# EAGLE board Tracker_V1 (EAGLE 9.6.2)
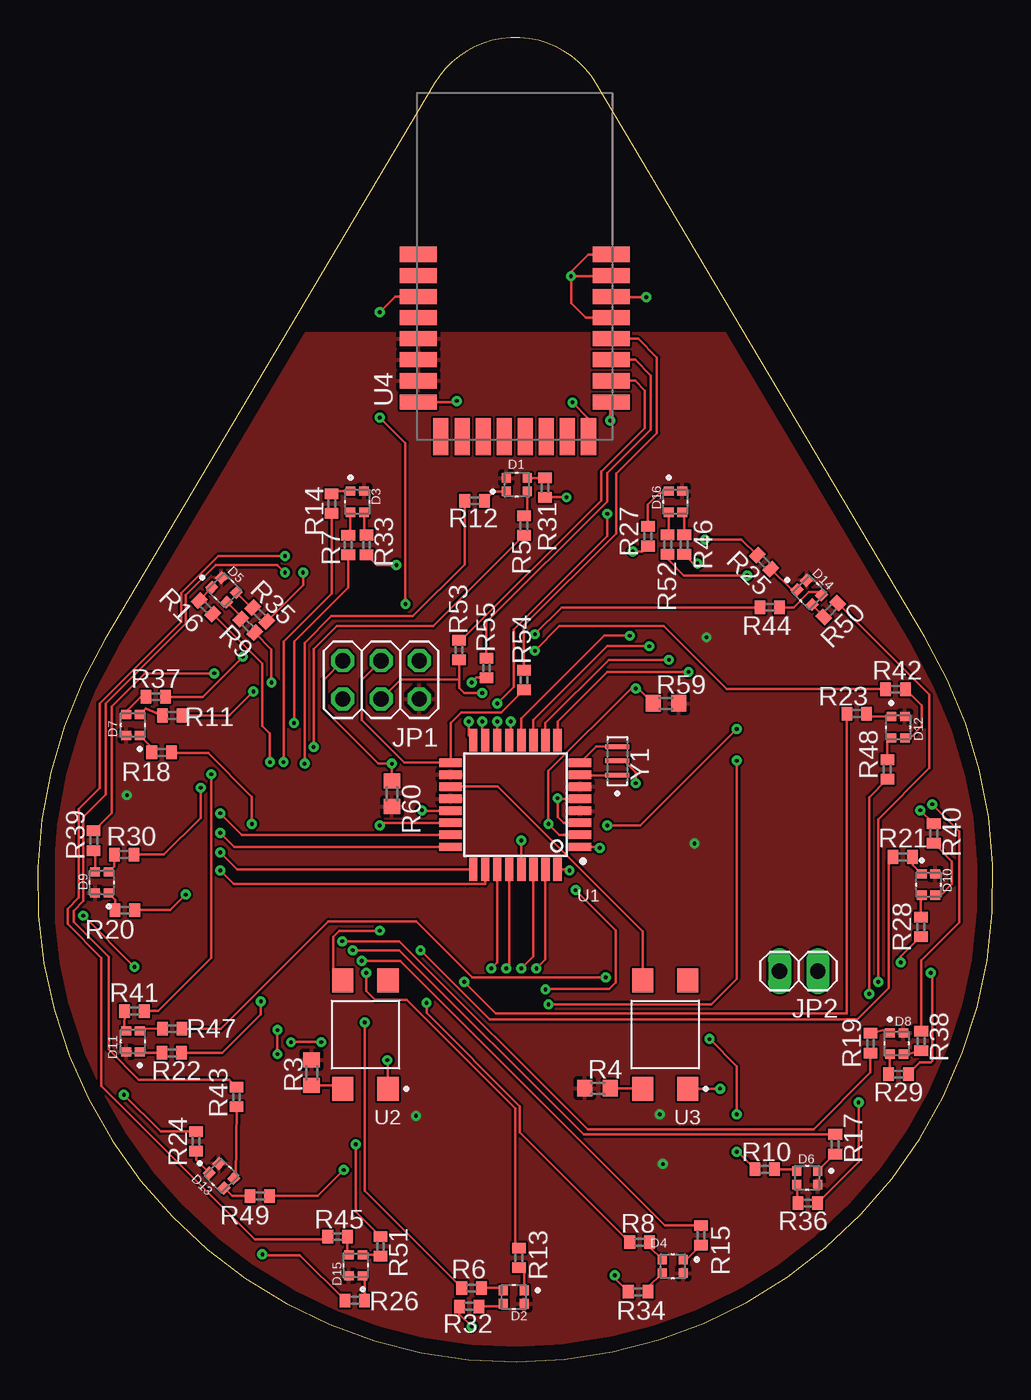
[diagram p0: board, top side]
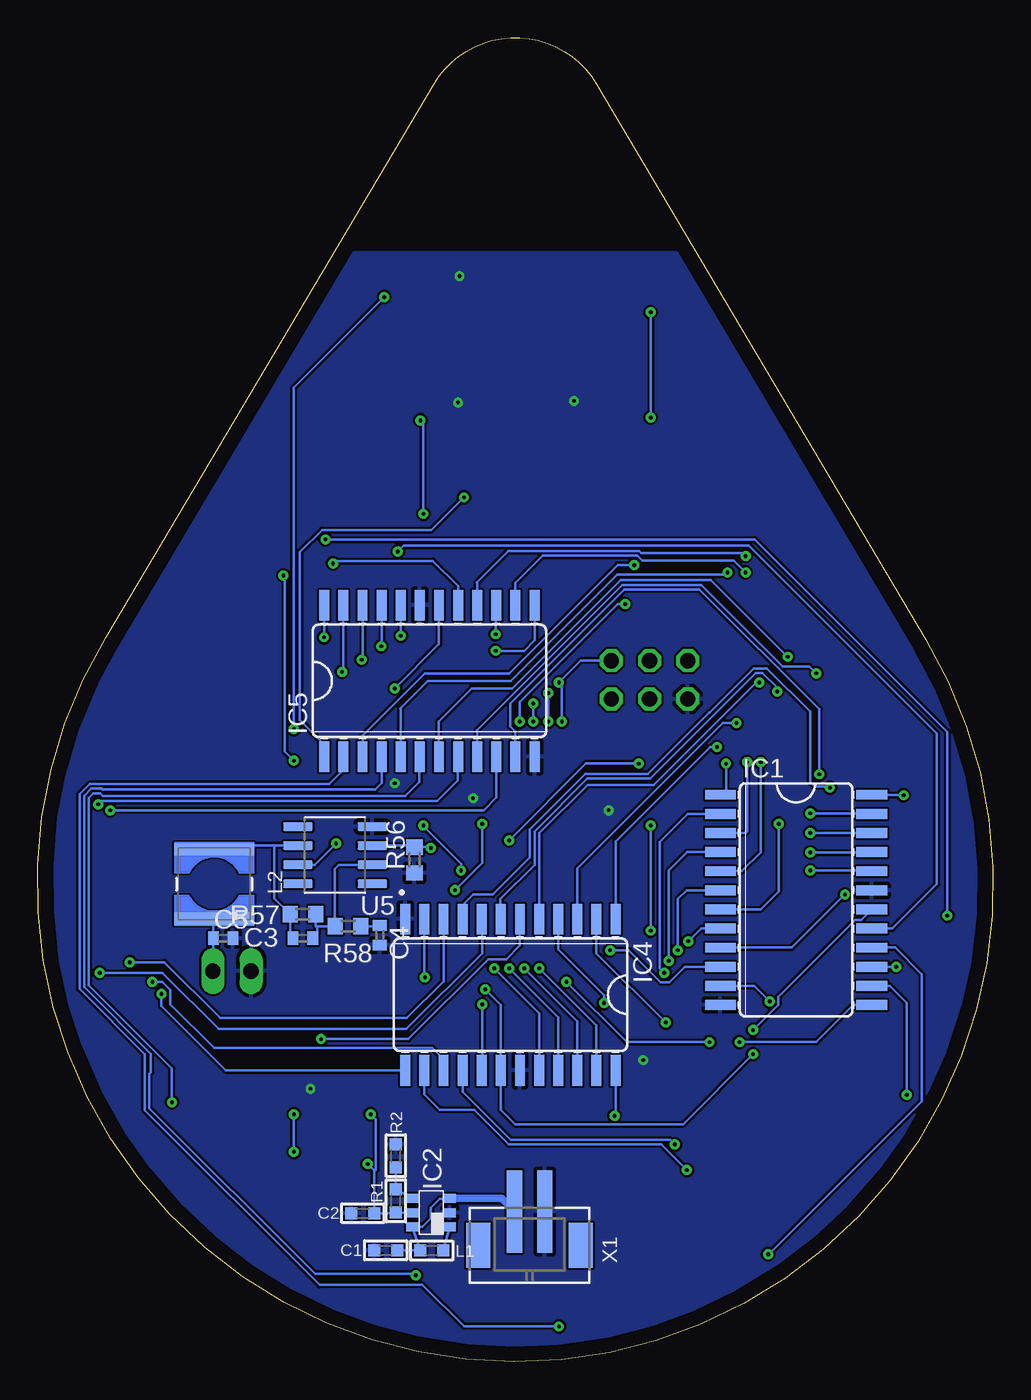
[diagram p1: board, bottom side, seen from below]

Size 63.45 x 87.99 mm. Coordinates in mm from the lower left corner, seen from the top.
Outline: 37.11,84.94 arc119 26.35,84.94
Outline: 37.11,84.94 arc119 26.35,84.94
Outline: 4.45,48 arc242 58.91,48.16
Outline: 26.35,84.94 4.45,48
Outline: 37.11,84.94 arc119 26.35,84.94
Outline: 58.91,48.16 37.11,84.94
Outline: 4.45,48 arc242 58.91,48.16
Copper layers (1*16): Top 0.035mm / dielectric 1.5mm / Bottom 0.035mm
Design rules "default *": minimum track width 6mil, minimum drill 0.25mm, track to track 6mil, track to pad 6mil, pad to pad 6mil, via to via 6mil, smd to smd 6mil, copper to edge 40mil, drill to drill 6mil, minimum pad ring 10mil, minimum via ring 8mil, stop-mask expansion 4mil, vias tented up to drill 0mil, thermal gap 10mil

## Footprints (pad centres in the part's own frame; a part is rotated, then mirrored left to right if it is on the bottom)
C0603 = smd 0.8 x 0.8: 1 -0.762,0; 2 0.762,0
C0402 = smd 0.7 x 0.9: 1 -0.65,0; 2 0.65,0
LED_EAST1616RGBA3 = smd 0.6 x 0.65: 1 0.7,0.45; 2 -0.7,0.45; 3 0.7,-0.45; 4 -0.7,-0.45
SO24W = smd 0.66 x 2.032: 1 -6.985,-5.029; 2 -5.715,-5.029; 3 -4.445,-5.029; 4 -3.175,-5.029; 5 -1.905,-5.029; 6 -0.635,-5.029; 7 0.635,-5.029; 8 1.905,-5.029; 9 3.175,-5.029; 10 4.445,-5.029; 11 5.715,-5.029; 12 6.985,-5.029; 13 6.985,5.029; 14 5.715,5.029; 15 4.445,5.029; 16 3.175,5.029; 17 1.905,5.029; 18 0.635,5.029; 19 -0.635,5.029; 20 -1.905,5.029; 21 -3.175,5.029; 22 -4.445,5.029; 23 -5.715,5.029; 24 -6.985,5.029
TSOT23-6_DDC = smd 0.6 x 0.8: 1 -0.95,-1.25; 2 0,-1.25; 3 0.95,-1.25; 4 0.95,1.25; 5 0,1.25; 6 -0.95,1.25
2X03 = drill 1.016 octagon: 1 -2.54,-1.27; 2 -2.54,1.27; 3 0,-1.27; 4 0,1.27; 5 2.54,-1.27; 6 2.54,1.27
1X02 = drill 1.016 long: 1 -1.27,0; 2 1.27,0
L0603 = smd 0.8 x 0.8: 1 -0.762,0; 2 0.762,0
WE-TPC_4828 = smd 0.8 x 5.3: 1 -2.3,0; 2 2.3,0
R0603 = smd 0.8 x 0.8: 1 -0.762,0; 2 0.762,0
R0603' = smd 1 x 1.1: 1 -0.85,0; 2 0.85,0
R0402 = smd 0.7 x 0.9: 1 -0.65,0; 2 0.65,0
QFP80P900X900X120-32N = smd 1.5 x 0.55: 1 -4.3,2.8; 2 -4.3,2; 3 -4.3,1.2; 4 -4.3,0.4; 5 -4.3,-0.4; 6 -4.3,-1.2; 7 -4.3,-2; 8 -4.3,-2.8; 17 4.3,-2.8; 18 4.3,-2; 19 4.3,-1.2; 20 4.3,-0.4; 21 4.3,0.4; 22 4.3,1.2; 23 4.3,2; 24 4.3,2.8 | smd 0.55 x 1.5: 9 -2.8,-4.3; 10 -2,-4.3; 11 -1.2,-4.3; 12 -0.4,-4.3; 13 0.4,-4.3; 14 1.2,-4.3; 15 2,-4.3; 16 2.8,-4.3; 25 2.8,4.3; 26 2,4.3; 27 1.2,4.3; 28 0.4,4.3; 29 -0.4,4.3; 30 -1.2,4.3; 31 -2,4.3; 32 -2.8,4.3
SW_TL3305AF260QG = smd 1.4 x 1.6: 1 -1.5,3.6; 2 -1.5,-3.6; 3 1.5,3.6; 4 1.5,-3.6
XCVR_DWM1000 = smd 2.45 x 1: 1 -6.4,1.8; 2 -6.4,0.4; 3 -6.4,-1; 4 -6.4,-2.4; 5 -6.4,-3.8; 6 -6.4,-5.2; 7 -6.4,-6.6; 8 -6.4,-8; 17 6.4,-8; 18 6.4,-6.6; 19 6.4,-5.2; 20 6.4,-3.8; 21 6.4,-2.4; 22 6.4,-1; 23 6.4,0.4; 24 6.4,1.8 | smd 1 x 2.45: 9 -4.9,-10.295; 10 -3.5,-10.295; 11 -2.1,-10.295; 12 -0.7,-10.295; 13 0.7,-10.295; 14 2.1,-10.295; 15 3.5,-10.295; 16 4.9,-10.295
SOIC127P600X175-8N = smd 1.97 x 0.57: 1 -2.475,1.905; 2 -2.475,0.635; 3 -2.475,-0.635; 4 -2.475,-1.905; 5 2.475,-1.905; 6 2.475,-0.635; 7 2.475,0.635; 8 2.475,1.905
B2B-PH-SM4-TB = smd 1 x 5.5: 1 1,0; 2 -1,0 | smd 1.6 x 3: M1 3.4,-2.25; M2 -3.4,-2.25
OSC_CSTCE16M0V53-R0 = smd 0.3 x 1.6: 1 -0.95,0; 2 0,0; 3 0.95,0

## Placement (x,y rotation side)
C1  10u  [C0603]  40.34,7.41 0 bottom
C2  10u  [C0603]  41.85,9.88 0 bottom
C3  47pF  [C0402]  45.83,28.15 0 bottom
C4  1uF  [C0402]  40.73,28.35 270 bottom
C5  4.7uF  [C0402]  51.13,28.15 0 bottom
D1  LED_EAST1616RGBA3  [LED_EAST1616RGBA3]  31.83,58.29 180 top
D2  LED_EAST1616RGBA3  [LED_EAST1616RGBA3]  31.63,4.31 0 top
D3  LED_EAST1616RGBA3  [LED_EAST1616RGBA3]  21.23,57.15 90 top
D4  LED_EAST1616RGBA3  [LED_EAST1616RGBA3]  42.19,6.35 0 top
D5  LED_EAST1616RGBA3  [LED_EAST1616RGBA3]  12.38,51.3 135 top
D6  LED_EAST1616RGBA3  [LED_EAST1616RGBA3]  51.11,12.23 0 top
D7  LED_EAST1616RGBA3  [LED_EAST1616RGBA3]  6.33,42.31 270 top
D8  LED_EAST1616RGBA3  [LED_EAST1616RGBA3]  57.06,21.15 90 top
D9  LED_EAST1616RGBA3  [LED_EAST1616RGBA3]  4.26,31.85 270 top
D10  LED_EAST1616RGBA3  [LED_EAST1616RGBA3]  59.17,31.71 90 top
D11  LED_EAST1616RGBA3  [LED_EAST1616RGBA3]  6.33,21.29 270 top
D12  LED_EAST1616RGBA3  [LED_EAST1616RGBA3]  57.16,42.17 90 top
D13  LED_EAST1616RGBA3  [LED_EAST1616RGBA3]  12.21,12.37 135 top
D14  LED_EAST1616RGBA3  [LED_EAST1616RGBA3]  51.25,51.13 135 top
D15  LED_EAST1616RGBA3  [LED_EAST1616RGBA3]  21.13,6.42 270 top
D16  LED_EAST1616RGBA3  [LED_EAST1616RGBA3]  42.36,57.15 90 top
IC1  74154DW  [SO24W]  13.08,30.7 270 bottom
IC2  TPS61070DDC  [TSOT23-6_DDC]  37.32,9.91 90 bottom
IC4  74154DW  [SO24W]  32.05,24.4 180 bottom
IC5  74154DW  [SO24W]  37.43,45.25 0 bottom
JP1  [2X03]  22.81,45.32 180 top
JP2  [1X02]  50.55,25.97 180 top
L1  4.7u  [L0603]  37.28,7.4 180 bottom
L2  1500uH  [WE-TPC_4828]  51.73,31.75 270 bottom
R1  1M  [R0603]  39.66,10.7 270 bottom
R2  178k  [R0603]  39.66,13.7 270 bottom
R3  10k  [R0603']  18.2,19.21 270 top
R4  10k  [R0603']  37.19,18.18 0 top
R5  750 1%  [R0402]  32.29,55.56 90 top
R6  750 1%  [R0402]  28.82,4.91 0 top
R7  750 1%  [R0402]  20.63,54.28 90 top
R8  750 1%  [R0402]  39.98,7.95 0 top
R9  750 1%  [R0402]  13.95,48.91 135 top
R10  750 1%  [R0402]  48.3,12.8 0 top
R11  750 1%  [R0402]  8.93,42.95 180 top
R12  750 1%  [R0402]  29.02,57.22 0 top
R13  750 1%  [R0402]  31.96,6.91 270 top
R14  750 1%  [R0402]  19.53,57.03 90 top
R15  750 1%  [R0402]  44.07,8.42 270 top
R16  750 1%  [R0402]  11.18,50.14 135 top
R17  750 1%  [R0402]  52.98,14.47 270 top
R18  750 1%  [R0402]  8.23,40.5 180 top
R19  750 1%  [R0402]  55.32,21.18 90 top
R20  750 1%  [R0402]  5.8,30.02 180 top
R21  750 1%  [R0402]  57.47,33.55 0 top
R22  750 1%  [R0402]  8.92,20.54 180 top
R23  750 1%  [R0402]  54.4,43.08 0 top
R24  750 1%  [R0402]  10.52,14.66 270 top
R25  750 1%  [R0402]  48.25,53.14 315 top
R26  750 1%  [R0402]  21.07,4.09 0 top
R27  750 1%  [R0402]  40.53,54.86 90 top
R28  750 1%  [R0402]  58.66,28.91 90 top
R29  750 1%  [R0402]  57.18,19.12 180 top
R30  750 1%  [R0402]  5.74,33.71 180 top
R31  750 1%  [R0402]  33.7,58.09 90 top
R32  750 1%  [R0402]  28.66,3.69 0 top
R33  750 1%  [R0402]  21.84,54.29 90 top
R34  750 1%  [R0402]  39.88,4.66 0 top
R35  750 1%  [R0402]  14.75,49.66 135 top
R36  750 1%  [R0402]  51.15,10.56 180 top
R37  750 1%  [R0402]  7.85,44.19 180 top
R38  750 1%  [R0402]  58.69,21.32 270 top
R39  750 1%  [R0402]  3.72,34.63 270 top
R40  750 1%  [R0402]  59.52,35.12 270 top
R41  750 1%  [R0402]  6.43,23.32 180 top
R42  750 1%  [R0402]  56.98,44.7 0 top
R43  750 1%  [R0402]  13.21,17.6 270 top
R44  750 1%  [R0402]  48.64,50.14 0 top
R45  750 1%  [R0402]  19.92,8.32 0 top
R46  750 1%  [R0402]  42.95,54.31 90 top
R47  750 1%  [R0402]  8.94,22.14 180 top
R48  750 1%  [R0402]  56.44,39.37 90 top
R49  750 1%  [R0402]  14.76,11.03 180 top
R50  750 1%  [R0402]  52.68,49.96 225 top
R51  750 1%  [R0402]  22.77,7.69 270 top
R52  750 1%  [R0402]  41.85,54.32 90 top
R53  0  [R0402]  27.99,47.31 90 top
R54  0  [R0402]  32.3,45.31 90 top
R55  0  [R0402]  29.81,46.11 90 top
R56  1M  [R0603']  38.43,33.35 90 bottom
R57  220k  [R0603']  45.83,29.75 0 bottom
R58  10k  [R0603']  42.83,28.95 180 bottom
R59  10k  [R0603']  41.73,43.75 0 top
R60  10k  [R0603']  23.53,37.75 270 top
U1  ATMEGA328P-AU  [QFP80P900X900X120-32N]  31.73,37.02 180 top
U2  TL3305AF260QG  [SW_TL3305AF260QG]  21.77,21.75 180 top
U3  TL3305AF260QG  [SW_TL3305AF260QG]  41.69,21.75 180 top
U4  DWM1000  [XCVR_DWM1000]  31.69,71.79 0 top
U5  UA741CD  [SOIC127P600X175-8N]  43.7,33.67 180 bottom
X1  B2B-PH-SM4-TB  [B2B-PH-SM4-TB]  30.78,9.99 0 bottom
Y1  CSTCE16M0V53-R0  [OSC_CSTCE16M0V53-R0]  38.51,39.93 90 top

## Library data of the parts
C1 C2 = rc-master-smd; C1: 10uF
C3-C5 = rcl; SPICEPREFIX: C
D1-D16 = LED_EAST1616RGBA3
IC1 IC4 IC5 = 74xx-us
IC2 = texas; MPN: TPS61070DDCR; OC_FARNELL: 1461062; OC_NEWARK: 64M3125
JP1 JP2 = pinhead
L1 = rc-master-smd; L1: 4.7uH
L2 = Eagle_WE-TPC_rev19a; DATASHEET-URL: https://katalog.we-online.com/pbs/datasheet/744043152.pdf; FRES: 2MHz; IR: 0.09A; ISAT: 0.05A; PART-NUMBER: 744043152; RDC-MAX: 9000mOhm; RDC-TYP: 6800mOhm
R1 R2 = rc-master-smd
R3-R55 = resistor
R56-R60 = rcl; SPICEPREFIX: R
U1 = ATMEGA328P-AU; AVAILABILITY: Good; DESCRIPTION: AVR AVR® ATmega Microcontroller IC 8-Bit 20MHz 32KB (16K x 16) FLASH 32-TQFP (7x7); MF: Microchip Technology; MP: ATMEGA328P-AU; PACKAGE: TQFP-32 Microchip Technology; PRICE: None; PURCHASE-URL: https://pricing.snapeda.com/search/part/ATMEGA328P-AU/?ref=eda
U2 U3 = TL3305AF260QG; AVAILABILITY: Warning; DESCRIPTION: Tactile Switch SPST-NO Top Actuated Surface Mount; MF: E-Switch; MP: TL3305AF260QG; PACKAGE: LQFP-48 E-Switch; PRICE: None; PURCHASE-URL: https://pricing.snapeda.com/search/part/TL3305AF260QG/?ref=eda
U4 = DWM1000; AVAILABILITY: Warning; DESCRIPTION: 802.15.4 IR-UWB Transceiver Module 3.5GHz ~ 6.5GHz Integrated, Chip Surface Mount; MF: Decawave Limited; MP: DWM1000; PACKAGE: Module Decawave; PRICE: None; PURCHASE-URL: https://pricing.snapeda.com/search/part/DWM1000/?ref=eda
U5 = UA741CD; AVAILABILITY: Good; DESCRIPTION: General Purpose Amplifier 1 Circuit 8-SO; MF: STMicroelectronics; MP: UA741CD; PACKAGE: SOIC-8 STMicroelectronics; PRICE: None; PURCHASE-URL: https://pricing.snapeda.com/search/part/UA741CD/?ref=eda
X1 = con-JST PH
Y1 = CSTCE16M0V53-R0; AVAILABILITY: Bad; DESCRIPTION: 16MHz Ceramic Resonator Built in Capacitor 15pF ±0.3% -20°C ~ 80°C Surface Mount; MF: Murata; MP: CSTCE16M0V53-R0; PACKAGE: SMD-3 Murata; PRICE: None

## Nets
BL_A: IC1.23 U1.23
BL_B: IC1.22 U1.24
BL_C: IC1.21 U1.25
BL_D: IC1.20 U1.26
GND: C1.1 C2.1 C4.2 C5.2 IC1.12 IC1.19 IC2.2 IC4.12 IC4.19 IC5.12 IC5.19 JP1.6 JP2.2 R2.1 R56.1 U1.3 U1.5 U1.21 U2.1 U3.1 U4.8 U4.16 U4.21 U4.23 U4.24 U5.4 X1.1 Y1.2
GR_A: IC4.23 U1.27
GR_B: IC4.22 U1.28
GR_C: IC4.21 U1.30
GR_D: IC4.20 U1.31
LED_ON: IC1.18 IC4.18 IC5.18 R59.1 U1.2
N$1: IC2.1 L1.1
N$2: C1.2 IC2.3 IC2.6 L1.2 X1.2
N$3: R4.2 U3.3
N$4: D1.1 R12.2
N$5: R3.2 U2.3
N$6: IC2.4 R1.1 R2.2
N$7: D7.1 R18.2
N$8: D3.1 R14.2
N$9: D4.1 R15.2
N$10: D5.1 R16.2
N$11: D6.1 R17.2
N$12: D2.1 R13.2
N$13: D8.1 R19.2
N$14: D9.1 R20.2
N$15: D10.1 R21.2
N$16: D11.1 R22.2
N$17: D12.1 R23.2
N$18: D13.1 R24.2
N$19: D14.1 R25.2
N$20: D15.1 R26.2
N$21: D16.1 R27.2
N$22: IC4.1 R5.1
N$23: IC4.2 R6.1
N$24: IC4.3 R7.1
N$25: D4.2 R8.2
N$26: D5.2 R9.2
N$27: D7.2 R11.2
N$28: D6.2 R10.2
N$29: D8.2 R29.2
N$30: D9.2 R30.2
N$31: IC4.10 R28.1
N$32: D11.2 R47.2
N$33: D12.2 R48.2
N$34: IC4.14 R49.1
N$35: IC4.15 R50.1
N$36: IC4.16 R51.1
N$37: IC4.17 R52.1
N$38: D16.4 R46.2
N$39: D15.4 R45.2
N$40: D14.4 R44.2
N$41: D13.4 R43.2
N$42: D12.4 R42.2
N$43: D11.4 R41.2
N$44: D10.4 R40.2
N$45: D9.4 R39.2
N$46: D8.4 R38.2
N$47: D7.4 R37.2
N$48: D6.4 R36.2
N$49: D5.4 R35.2
N$50: D4.4 R34.2
N$51: D3.4 R33.2
N$52: D2.4 R32.2
N$53: D1.4 R31.2
N$54: D1.2 R5.2
N$55: D2.2 R6.2
N$56: D3.2 R7.2
N$57: IC4.4 R8.1
N$58: IC4.5 R9.1
N$59: IC4.6 R10.1
N$60: IC4.7 R11.1
N$61: IC1.1 R12.1
N$62: IC1.2 R13.1
N$63: IC1.3 R14.1
N$64: IC1.4 R15.1
N$65: IC1.5 R16.1
N$66: IC1.6 R17.1
N$67: IC1.7 R18.1
N$68: IC1.8 R19.1
N$69: IC1.9 R20.1
N$70: IC1.10 R21.1
N$71: IC1.11 R22.1
N$72: IC1.13 R23.1
N$73: IC1.14 R24.1
N$74: IC1.15 R25.1
N$75: IC1.16 R26.1
N$76: IC1.17 R27.1
N$77: IC4.8 R29.1
N$78: IC4.9 R30.1
N$79: D10.2 R28.2
N$80: IC5.1 R31.1
N$81: IC5.2 R32.1
N$82: IC5.3 R33.1
N$83: IC5.4 R34.1
N$84: IC5.5 R35.1
N$85: IC5.6 R36.1
N$86: IC5.7 R37.1
N$87: IC5.8 R38.1
N$88: IC5.9 R39.1
N$89: IC5.10 R40.1
N$90: IC5.11 R41.1
N$91: IC5.13 R42.1
N$92: IC5.14 R43.1
N$93: IC5.15 R44.1
N$94: IC5.16 R45.1
N$95: IC5.17 R46.1
N$96: IC4.11 R47.1
N$97: IC4.13 R48.1
N$98: D13.2 R49.2
N$99: D14.2 R50.2
N$100: D15.2 R51.2
N$101: D16.2 R52.2
N$102: U1.14 U4.17
N$103: JP1.4 R53.1 U1.15
N$104: JP1.1 R55.1 U1.16
N$105: JP1.3 R54.1 U1.17
N$106: U1.13 U4.3
N$107: U1.32 U4.22
N$108: U1.8 Y1.3
N$109: U1.7 Y1.1
N$110: JP1.5 R60.1 U1.29
N$111: R53.2 U4.18
N$112: R54.2 U4.20
N$113: R55.2 U4.19
N$114: R56.2 U1.1 U5.3
N$115: C3.1 L2.1 R57.1 U5.6
N$116: C5.1 JP2.1 L2.2
N$117: C3.2 R57.2 R58.2 U5.2
N$118: C4.1 R58.1
RD_A: IC5.23 U1.9
RD_B: IC5.22 U1.10
RD_C: IC5.21 U1.11
RD_D: IC5.20 U1.12
SW1: U1.19 U3.4
SW2: U1.22 U2.4
VCC: C2.2 D1.3 D2.3 D3.3 D4.3 D5.3 D6.3 D7.3 D8.3 D9.3 D10.3 D11.3 D12.3 D13.3 D14.3 D15.3 D16.3 IC1.24 IC2.5 IC4.24 IC5.24 JP1.2 R1.2 R3.1 R4.1 R59.2 R60.2 U1.4 U1.6 U1.18 U1.20 U4.5 U4.6 U4.7 U5.7

## Tracks (layer width: path | path; a pad name or v marks a point on that pad's centre or on a via)
BL_A  (via drill 0.25)
  Top 0.152: U1.23 13.56,35.02 v12.13,36.45
  Bottom 0.152: v12.13,36.45 8.09,36.45 IC1.23
BL_B  (via drill 0.25)
  Top 0.152: U1.24 13.06,34.22 v12.13,35.15
  Bottom 0.152: v12.13,35.15 v12.13,35.14 IC1.22
BL_C  (via drill 0.25)
  Top 0.152: U1.25 13.26,32.72 v12.13,33.85
  Bottom 0.152: v12.13,33.85 8.08,33.85 IC1.21
BL_D  (via drill 0.25)
  Top 0.152: U1.26 29.73,31.75 29.31,31.75 29.3,31.74 28.56,31.74 28.55,31.75 13.03,31.75 v12.13,32.65
  Bottom 0.152: v12.13,32.65 8.1,32.65 IC1.20
GND  (via drill 0.25)
  Top 0.152: U3.1 v45.33,18.15 | 23.33,18.09 U2.1 23.27,20.01 v23.23,20.05 | U1.21 25.56,36.62 v25.53,36.65 | U1.5 34.53,37.42 v34.53,37.45 34.53,36.22 34.93,35.82 U1.3 | U4.21 36.39,69.39 35.43,70.35 v35.43,72.15 | U4.24 36.57,73.59 35.43,72.45 v35.43,72.15 | U4.23 38.05,72.15 v35.43,72.15 | U4.8 27.77,63.79 v27.83,63.85 | U4.16 36.59,62.69 v35.53,63.75 | Y1.2 38.95,39.93 39.73,39.15 v39.73,38.45
  pour Bottom: 0.73,73.75 62.73,73.75 62.73,0.25 0.73,0.25
GR_A  (via drill 0.25)
  Top 0.152: U1.27 30.53,26.55 v30.13,26.15
  Bottom 0.152: IC4.23 26.34,22.35 v30.13,26.15
GR_B  (via drill 0.25)
  Top 0.152: U1.28 31.33,26.35 v31.13,26.15
  Bottom 0.152: IC4.22 27.61,22.62 v31.13,26.15
GR_C  (via drill 0.25)
  Top 0.152: U1.30 32.93,26.95 v32.13,26.15
  Bottom 0.152: IC4.21 28.88,22.89 v32.13,26.15
GR_D  (via drill 0.25)
  Top 0.152: U1.31 33.73,26.75 v33.13,26.15
  Bottom 0.152: IC4.20 30.15,23.16 v33.13,26.15
LED_ON  (via drill 0.25)
  Top 0.152: U1.2 34.66,35.02 v33.93,35.75 33.93,39.25 39.43,44.75 v39.73,44.75 39.88,44.75 R59.1 | v15.93,22.05 v15.93,20.45 | v33.73,24.75 33.77,24.79 37.96,24.79 38.39,25.22 38.39,28.68 35.73,31.34 v35.73,31.35
  Bottom 0.152: IC5.18 36.8,47.68 v39.73,44.75 | IC1.18 8.76,29.35 9.16,29.35 14.27,24.24 14.27,23.72 15.93,22.06 v15.93,22.05 | v15.93,20.45 20.59,15.79 31.73,15.79 32.69,16.75 IC4.18 32.69,23.7 v33.73,24.75 | v35.73,31.35 33.93,33.15 v33.93,35.75
N$1
  Bottom 0.152: IC2.1 L1.1
N$2
  Bottom 0.152: C1.2 L1.2 IC2.6 37.92,8.96 37.33,9.55 37.33,10.25 36.73,10.85 IC2.3 | X1.2
  Bottom 0.508: IC2.3 32.64,10.86 X1.2
N$3
  Top 0.152: R4.2 40.16,18.18 U3.3
N$4
  Top 0.152: R12.2 30.29,57.84 D1.1
N$5
  Top 0.152: R3.2 20.06,18.36 U2.3
N$6
  Bottom 0.152: IC2.4 R1.1 R2.2
N$7
  Top 0.152: R18.2 7.58,40.81 D7.1
N$8
  Top 0.152: R14.2 19.7,57.85 D3.1
N$9
  Top 0.152: R15.2 43.1,6.8 D4.1
N$10
  Top 0.152: D5.1 11.57,51.45 R16.2
N$11
  Top 0.152: D6.1 52.95,13.82 R17.2
N$12
  Top 0.152: D2.1 32.33,5.89 R13.2
N$13
  Top 0.152: D8.1 56.36,22.1 R19.2
N$14
  Top 0.152: R20.2 5.15,30.71 D9.1
N$15
  Top 0.152: R21.2 58.12,33.01 D10.1
N$16
  Top 0.152: D11.1 6.83,20.54 R22.2
N$17
  Top 0.152: D12.1 55.26,42.87 R23.2
N$18
  Top 0.152: R24.2 10.52,13.42 D13.1
N$19
  Top 0.152: D14.1 | R25.2 50.08,51.31 D14.1
N$20
  Top 0.152: R26.2 21.72,5.58 D15.1
N$21
  Top 0.152: D16.1 41.81,57.75 41.33,57.75 40.53,56.95 R27.2
N$22  (via drill 0.25)
  Top 0.152: R5.1 26.26,48.88 19.86,48.88 18.33,47.35 v18.33,40.85
  Bottom 0.152: v18.33,40.85 18.78,40.85 25.07,34.57 IC4.1
N$23  (via drill 0.25)
  Top 0.152: R6.1 21.73,11.35 v21.73,22.55
  Bottom 0.152: v21.73,22.55 26.34,27.15 IC4.2
N$24  (via drill 0.25)
  Top 0.152: R7.1 20.63,51.45 17.03,47.85 v17.03,42.45
  Bottom 0.152: v17.03,42.45 17.93,42.45 27.61,32.77 IC4.3
N$25
  Top 0.152: R8.2 40.63,7.66 D4.2
N$26
  Top 0.152: D5.2 13.49,49.55 R9.2
N$27
  Top 0.152: R11.2 7.18,43.41 D7.2
N$28
  Top 0.152: R10.2 50.29,12.8 D6.2
N$29
  Top 0.152: R29.2 56.61,19.46 D8.2
N$30
  Top 0.152: R30.2 5.09,32.93 D9.2
N$31  (via drill 0.25)
  Top 0.152: R28.1 57.33,26.93 v57.33,26.55
  Bottom 0.152: v57.33,26.55 55.03,26.55 51.33,22.85 38.93,22.85 36.5,25.28 IC4.10
N$32
  Top 0.152: R47.2 6.95,22.16 D11.2
N$33
  Top 0.152: R48.2 56.44,41.2 D12.2
N$34  (via drill 0.25)
  Top 0.152: R49.1 18.61,11.03 v20.33,12.75
  Bottom 0.152: v20.33,12.75 22.03,14.44 32.16,14.44 34.46,16.75 36.73,16.75 37.77,17.78 IC4.14
N$35  (via drill 0.25)
  Top 0.152: R50.1 59.23,44.33 59.23,39.45 55.83,36.05 v55.83,25.25
  Bottom 0.152: v55.83,25.25 55.18,25.25 54.63,24.7 54.63,23.75 51.73,20.85 37.23,20.85 36.5,20.11 IC4.15
N$36  (via drill 0.25)
  Top 0.152: R51.1 21.13,9.98 v21.13,14.45
  Bottom 0.152: v21.13,14.45 21.43,14.75 32.03,14.75 35.23,17.95 IC4.16
N$37  (via drill 0.25)
  Top 0.152: R52.1 41.85,53.33 42.93,52.25 v47.13,52.25 | v46.43,39.95 46.43,25.45 44.73,23.75 v33.93,23.75
  Bottom 0.152: v47.13,52.25 47.03,52.15 47.03,40.55 v46.43,39.95 | v33.93,23.75 33.93,19.4 IC4.17
N$38
  Top 0.152: D16.4 42.95,56.31 R46.2
N$39
  Top 0.152: R45.2 20.57,7.23 D15.4
N$40
  Top 0.152: D14.4 51.87,51.15 51.23,51.15 50.22,50.14 R44.2
N$41
  Top 0.152: R43.2 13.15,12.19 D13.4
N$42
  Top 0.152: D12.4 57.95,41.47 58.73,42.25 58.73,43.6 R42.2
N$43
  Top 0.152: R41.2 5.76,22.11 D11.4
N$44
  Top 0.152: R40.2 60.73,33.26 60.73,31.75 59.99,31.01 D10.4
N$45
  Top 0.152: R39.2 3.81,33.89 D9.4
N$46
  Top 0.152: R38.2 57.55,20.41 D8.4
N$47
  Top 0.152: R37.2 7.01,44.34 5.88,43.21 D7.4
N$48
  Top 0.152: R36.2 D6.4
N$49
  Top 0.152: D5.4 14.31,50 R35.2
N$50
  Top 0.152: R34.2 40.53,4.94 D4.4
N$51
  Top 0.152: D3.4 21.68,55.1 R33.2
N$52
  Top 0.152: R32.2 30.76,3.69 D2.4
N$53
  Top 0.152: D1.4 R31.2
N$54
  Top 0.152: D1.2 32.53,56.45 R5.2
N$55
  Top 0.152: R6.2 30.78,4.91 D2.2
N$56
  Top 0.152: D3.2 20.78,55.08 R7.2
N$57  (via drill 0.25)
  Top 0.152: R8.1 32.04,15.24 32.04,16.98 25.83,23.18 v25.83,23.85
  Bottom 0.152: v25.83,23.85 25.83,24.35 28.88,27.39 IC4.4
N$58  (via drill 0.25)
  Top 0.152: R9.1 15.53,47.33 v15.53,45.15
  Bottom 0.152: v15.53,45.15 15.73,45.15 22.53,38.35 26.93,38.35 30.15,35.13 IC4.5
N$59  (via drill 0.25)
  Top 0.152: R10.1 46.5,13.95 v46.43,13.95 | v46.43,16.45 46.43,19.65 v44.63,21.45
  Bottom 0.152: IC4.6 31.42,27.66 32.33,26.75 33.53,26.75 38.83,21.45 v44.63,21.45 | v46.43,13.95 v46.43,16.45
N$60  (via drill 0.25)
  Top 0.152: R11.1 12.73,42.95 v14.33,44.55
  Bottom 0.152: v14.33,44.55 14.33,44.8 15.31,45.78 15.75,45.78 22.77,38.75 26.96,38.75 30.45,35.26 30.45,33.03 32.73,30.75 32.73,29.47 IC4.7
N$61  (via drill 0.25)
  Top 0.152: v17.73,39.75 17.73,47.78 19.5,49.55 24.93,49.55 28.37,52.99 R12.1
  Bottom 0.152: IC1.1 17.73,38.06 v17.73,39.75
N$62  (via drill 0.25)
  Top 0.152: R13.1 31.73,7.79 31.73,16.85 24.53,24.05 22.43,24.05 21.83,24.65 v21.83,25.85
  Bottom 0.152: IC1.2 20.27,36.41 22.13,34.55 22.13,26.15 v21.83,25.85
N$63  (via drill 0.25)
  Top 0.152: v16.33,39.85 16.33,47.85 19.53,51.05 R14.1
  Bottom 0.152: IC1.3 16.44,35.14 16.33,35.25 v16.33,39.85
N$64  (via drill 0.25)
  Top 0.152: R15.1 41.67,9.07 24.09,26.65 v21.53,26.65
  Bottom 0.152: v21.53,26.65 21.53,32.65 20.31,33.87 IC1.4
N$65  (via drill 0.25)
  Top 0.152: R16.1 14.93,46.39 14.93,42.25 15.43,41.75 v15.43,39.85
  Bottom 0.152: IC1.5 16.68,32.6 15.43,33.85 v15.43,39.85
N$66  (via drill 0.25)
  Top 0.152: v20.93,27.35 24.03,27.35 36.26,15.12 R17.1
  Bottom 0.152: IC1.6 20.35,31.33 20.93,30.75 v20.93,27.35
N$67  (via drill 0.25)
  Top 0.152: R18.1 8.93,40.45 11.33,40.45 14.23,37.55 v14.23,35.75
  Bottom 0.152: IC1.7 15.42,30.06 14.23,31.25 v14.23,35.75
N$68  (via drill 0.25)
  Top 0.152: v20.23,27.95 24.03,27.95 36.53,15.45 51.54,15.45 55.32,19.23 R19.1
  Bottom 0.152: IC1.8 19.39,28.79 v20.23,27.95
N$69  (via drill 0.25)
  Top 0.152: v9.83,31.05 8.8,30.02 7.73,30.02 R20.1
  Bottom 0.152: IC1.9 13.36,27.52 v9.83,31.05
N$70  (via drill 0.25)
  Top 0.152: v25.43,27.35 30.03,22.75 54.43,22.75 56.53,24.85 56.53,33.26 R21.1
  Bottom 0.152: IC1.10 20.47,26.25 21.51,25.22 22.05,25.22 24.18,27.35 v25.43,27.35
N$71  (via drill 0.25)
  Top 0.152: R22.1 12.27,20.54 14.83,23.1 v14.83,23.95
  Bottom 0.152: IC1.11 15.87,24.98 v14.83,23.95
N$72  (via drill 0.25)
  Top 0.152: v28.33,25.25 30.43,23.15 53.75,23.15 R23.1 | v16.83,21.25 v18.83,21.25
  Bottom 0.152: IC1.13 9.27,23.71 11.73,21.25 v16.83,21.25 | v28.33,25.25 24.33,21.25 v18.83,21.25
N$73  (via drill 0.25)
  Top 0.152: R24.1 8.17,15.31 v5.73,17.75
  Bottom 0.152: v5.73,17.75 5.73,23.85 6.87,24.98 IC1.14
N$74  (via drill 0.25)
  Top 0.152: R25.1 46.74,54.65 v44.33,54.65 | v3.03,29.65 v6.43,26.25
  Bottom 0.152: v44.33,54.65 15.83,54.65 3.03,41.85 v3.03,29.65 | v6.43,26.25 IC1.15
N$75  (via drill 0.25)
  Top 0.152: R26.1 17.42,7.09 14.99,7.09 v14.93,7.15
  Bottom 0.152: IC1.16 6.51,27.52 4.73,25.75 4.73,17.3 14.89,7.15 v14.93,7.15
N$76  (via drill 0.25)
  Top 0.152: v39.53,53.85 40.17,53.85 R27.1
  Bottom 0.152: IC1.17 6.69,28.79 3.73,31.75 3.73,41.75 16.23,54.25 39.13,54.25 v39.53,53.85
N$77  (via drill 0.25)
  Top 0.152: R29.1 58.6,19.89 59.34,19.89 59.43,19.99 59.43,25.75 v59.33,25.85
  Bottom 0.152: v59.33,25.85 55.16,25.85 51.43,22.12 38.96,22.12 33.93,27.15 33.93,29.4 IC4.8
N$78  (via drill 0.25)
  Top 0.152: R30.1 8.39,33.71 10.83,36.15 v10.83,38.15
  Bottom 0.152: v10.83,38.15 10.9,38.22 11.85,38.22 12.13,38.5 12.13,43.2 15.02,46.09 15.87,46.09 18.81,43.15 18.83,43.15 22.92,39.06 27.08,39.06 30.76,35.39 30.76,33.52 33.23,31.05 34.53,31.05 35.23,30.35 IC4.9
N$79
  Top 0.152: R28.2 58.66,30.95 D10.2
N$80  (via drill 0.25)
  Top 0.152: v35.13,57.45 R31.1
  Bottom 0.152: v35.13,57.45 37.3,55.28 44.55,55.28 46.03,53.8 46.03,42.65 44.42,41.03 IC5.1
N$81  (via drill 0.25)
  Top 0.152: R32.1 28.01,3.17 v28.83,2.35
  Bottom 0.152: v28.83,2.35 35.13,2.35 37.9,5.12 44.73,5.12 56.34,16.72 56.34,20.44 60.67,24.78 60.67,37.72 60,38.39 44.09,38.39 43.15,39.33 IC5.2
N$82  (via drill 0.25)
  Top 0.152: R33.1 22.53,52.95 v23.83,52.95
  Bottom 0.152: v23.83,52.95 24.93,52.95 32.13,45.75 37.73,45.75 41.91,41.57 41.88,41.54 IC5.3
N$83  (via drill 0.25)
  Top 0.152: R34.1 38.33,5.56 v38.33,5.75
  Bottom 0.152: v38.33,5.75 38.43,5.85 45.03,5.85 56.03,16.85 56.03,19.15 55.93,19.25 55.93,20.47 60.37,24.9 60.37,37.6 59.88,38.09 59.18,38.09 59.15,38.05 41.03,38.05 40.61,38.47 IC5.4
N$84  (via drill 0.25)
  Top 0.152: R35.1 17.63,51.62 v17.63,52.45
  Bottom 0.152: v17.63,52.45 17.76,52.32 24.96,52.32 32.03,45.25 37.53,45.25 39.37,43.41 39.34,43.38 IC5.5
N$85  (via drill 0.25)
  Top 0.152: R36.1 54.53,13.29 v54.53,17.25
  Bottom 0.152: v54.53,17.25 54.53,19.5 60.06,25.03 60.06,37.47 59.75,37.78 59.31,37.78 59.12,37.59 39.03,37.59 38.1,38.52 38.1,40.19 IC5.6
N$86  (via drill 0.25)
  Top 0.152: R37.1 10.97,44.19 v13.63,46.85
  Bottom 0.152: v13.63,46.85 18.73,51.95 24.73,51.95 31.93,44.75 34.63,44.75 36.83,42.55 36.8,42.52 IC5.7
N$87  (via drill 0.25)
  Top 0.152: R38.1 58.69,26.67 61.23,29.21 61.23,35.25 v59.43,37.05
  Bottom 0.152: IC5.8 35.56,40.19 35.56,38.62 36.9,37.28 59.23,37.28 59.23,37.25 v59.43,37.05
N$88  (via drill 0.25)
  Top 0.152: R39.1 4.92,36.48 4.92,43.54 7.13,45.75 v11.73,45.75
  Bottom 0.152: v11.73,45.75 12.2,46.22 13.95,46.22 19.37,51.63 24.61,51.63 34.29,41.96 34.26,41.93 IC5.9
N$89  (via drill 0.25)
  Top 0.152: v58.63,36.65 v58.64,36.65 R40.1
  Bottom 0.152: v58.63,36.65 33.83,36.65 32.99,37.49 IC5.10
N$90  (via drill 0.25)
  Top 0.152: R41.1 8,23.32 11.53,26.85 v11.53,39.05
  Bottom 0.152: v11.53,39.05 11.53,43.37 19.49,51.33 24.49,51.33 32.06,43.76 32.06,42.23 31.72,41.88 IC5.11
N$91  (via drill 0.25)
  Top 0.152: R42.1 45.78,44.7 41.6,48.88 34.66,48.88 v33.03,47.25
  Bottom 0.152: v33.03,47.25 31.13,47.25 30.43,47.95 30.45,47.96 IC5.13
N$92  (via drill 0.25)
  Top 0.152: R43.1 12.71,18.75 6.73,18.75 4.73,20.75 4.73,26.9 2.4,29.23 2.4,29.97 3.04,30.61 3.04,36.22 4.52,37.7 4.52,43.73 9.83,49.05 9.83,50.95 11.83,52.95 15.93,52.95 v16.43,52.45
  Bottom 0.152: v16.43,52.45 17.23,53.25 23.28,53.25 23.61,53.58 29.9,53.58 31.73,51.75 31.72,51.73 IC5.14
N$93  (via drill 0.25)
  Top 0.152: R44.1 34.82,50.14 v33.03,48.35
  Bottom 0.152: IC5.15 33.03,50.23 v33.03,48.35
N$94  (via drill 0.25)
  Top 0.152: R45.1 19.1,8.15 14.43,8.15 4.23,18.35 4.23,26.85 1.99,29.09 1.99,30.11 2.73,30.84 2.73,36.75 4.11,38.13 4.11,43.76 9.53,49.18 9.53,51.08 12,53.55 v16.43,53.55
  Bottom 0.152: v16.43,53.55 16.63,53.75 23.35,53.75 23.48,53.89 32.19,53.89 34.29,51.79 34.26,51.76 IC5.16
N$95  (via drill 0.25)
  Top 0.152: R46.1 43.56,53.05 v43.83,53.05
  Bottom 0.152: v43.83,53.05 43.66,53.22 37.2,53.22 35.53,51.54 IC5.17
N$96  (via drill 0.25)
  Top 0.152: R47.1 12.17,22.14 19.31,29.28 25.15,29.28 28.88,25.55 v37.73,25.55
  Bottom 0.152: IC4.11 37.77,25.58 v37.73,25.55
N$97  (via drill 0.25)
  Top 0.152: R48.1 55.23,37.51 v55.23,24.45
  Bottom 0.152: v55.23,24.45 55.23,23.65 50.95,19.37 IC4.13
N$98
  Top 0.152: D13.2 12.91,11.03 R49.2
N$99
  Top 0.152: D14.2 52.22,49.52 R50.2
N$100
  Top 0.152: R51.2 22.74,7.12 D15.2
N$101
  Top 0.152: D16.2 41.91,55.03 R52.2
N$102  (via drill 0.25)
  Top 0.152: U1.14 v30.53,42.55 | v30.53,43.75 31.62,44.84 31.62,48.67 37.83,54.88 v37.83,56.35 | v38.03,62.55 38.03,63.73 U4.17
  Bottom 0.152: v30.53,43.75 v30.53,42.55 | v37.83,56.35 37.83,62.35 v38.03,62.55
N$103  (via drill 0.25)
  Top 0.152: R53.1 27.99,45.35 | 27.99,45.35 27.99,44.79 28.33,44.45 v29.53,44.45 | v29.53,42.55 29.53,41.52 U1.15 | JP1.4 24.11,45.35 27.99,45.35
  Bottom 0.152: v29.53,44.45 v29.53,42.55
N$104  (via drill 0.25)
  Top 0.152: v28.63,42.55 28.63,41.62 U1.16 | R55.1 29.14,45.46 v28.83,45.15
  Bottom 0.152: v28.63,42.55 28.63,44.95 v28.83,45.15 27.39,46.59 JP1.1
N$105
  Top 0.152: R54.1 30.79,43.15 28.13,43.15 27.43,42.45 27.43,40.65 U1.17 24.36,39.82 21.53,42.65 21.53,45.31 JP1.3
N$106  (via drill 0.25)
  Top 0.152: v31.43,42.55 31.43,41.42 U1.13 | v24.43,50.35 24.43,61.05 v22.73,62.75 | U4.3 23.77,70.79 v22.73,69.75
  Bottom 0.152: v31.43,42.55 31.43,43.85 24.93,50.35 v24.43,50.35 | v22.73,69.75 v22.73,62.75
N$107  (via drill 0.25)
  Top 0.152: U1.32 35.26,32.72 v35.33,32.65 | v46.43,42.05 40.03,35.65 v37.83,35.65 | v40.43,70.75 38.13,70.75 U4.22
  Bottom 0.152: v37.83,35.65 37.83,35.6 35.33,33.1 v35.33,32.65 | v46.43,42.05 46.43,64.75 v40.43,70.75
N$108
  Top 0.152: Y1.3 37.09,40.88 U1.8
N$109
  Top 0.152: Y1.1 36.07,38.98 U1.7
N$110  (via drill 0.25)
  Top 0.152: JP1.5 19.03,45.35 19.03,43.35 22.63,39.75 v23.53,39.75 R60.1 | U1.29 v32.13,34.65
  Bottom 0.152: v23.53,39.75 27.03,39.75 v32.13,34.65
N$111
  Top 0.152: R53.2 28.14,47.96 37.43,57.24 37.43,58.88 37.43,59.15 40.33,62.05 40.33,64.55 39.69,65.19 U4.18
N$112
  Top 0.152: R54.2 32.3,48.92 38.43,55.05 38.43,59.02 41.14,61.72 41.14,66.74 39.89,67.99 U4.20
N$113
  Top 0.152: R55.2 29.81,49.16 37.83,57.18 37.83,59.05 40.73,61.95 40.73,65.55 39.69,66.59 U4.19
N$114  (via drill 0.25)
  Top 0.152: U1.1 37.26,34.22 v37.33,34.15
  Bottom 0.152: U5.3 38.54,34.3 R56.2 37.38,34.2 v37.33,34.15
N$115
  Bottom 0.152: U5.6 47.73,34.3 | 47.73,34.3 51.48,34.3 L2.1 | 47.73,34.3 47.73,30.8 R57.1 46.68,28.35 C3.1
N$116
  Bottom 0.152: L2.2 51.78,29.4 C5.1 51.78,26.27 JP2.1
N$117
  Bottom 0.152: U5.2 43.45,33.03 43.73,32.75 43.73,29 R58.2 44.88,28.95 | R57.2 44.98,28.95 44.88,28.95 | 44.88,28.95 44.88,28.45 C3.2
N$118
  Bottom 0.152: R58.1 40.78,28.95 C4.1
RD_A  (via drill 0.25)
  Top 0.152: U1.9 34.53,42.55 37.83,45.85 v43.23,45.85
  Bottom 0.152: IC5.23 43.15,45.93 v43.23,45.85
RD_B  (via drill 0.25)
  Top 0.152: U1.10 33.73,42.45 37.93,46.65 v41.93,46.65
  Bottom 0.152: IC5.22 41.88,46.7 v41.93,46.65
RD_C  (via drill 0.25)
  Top 0.152: U1.11 32.93,42.65 37.83,47.55 v40.63,47.55
  Bottom 0.152: IC5.21 40.61,47.57 v40.63,47.55
RD_D  (via drill 0.25)
  Top 0.152: U1.12 32.13,42.75 37.63,48.25 v39.33,48.25
  Bottom 0.152: IC5.20 v39.34,48.25 v39.33,48.25
SW1
  Top 0.152: U1.19 30.56,38.22 40.19,28.59 U3.4
SW2  (via drill 0.25)
  Top 0.152: v22.73,28.65 20.04,28.65 19.64,28.25 19.64,25.98 U2.4 | v22.73,35.65 22.9,35.82 U1.22
  Bottom 0.152: v22.73,35.65 v22.73,28.65
VCC  (via drill 0.25)
  Bottom 0.152: IC1.24 5.97,37.68 v5.93,37.65 | U5.7 45.05,33.03 v43.63,34.45 | IC4.24 25.07,16.41 v25.13,16.35 | IC2.5 39.63,9.91 R1.2 39.72,9.88 C2.2 41.09,12.75 | v41.33,16.45 40.99,16.11 40.99,12.75 41.09,12.75 | 41.09,12.75 41.13,12.75 v41.53,13.15 | IC5.24 44.43,50.26 v44.43,48.15
  pour Top: 4.33,68.35 63.33,68.35 63.33,9.35 54.03,0.05 1.23,0.05 1.23,65.25